# EAGLE board Amplificador_Push_Pull_AB (EAGLE 7.6.0)
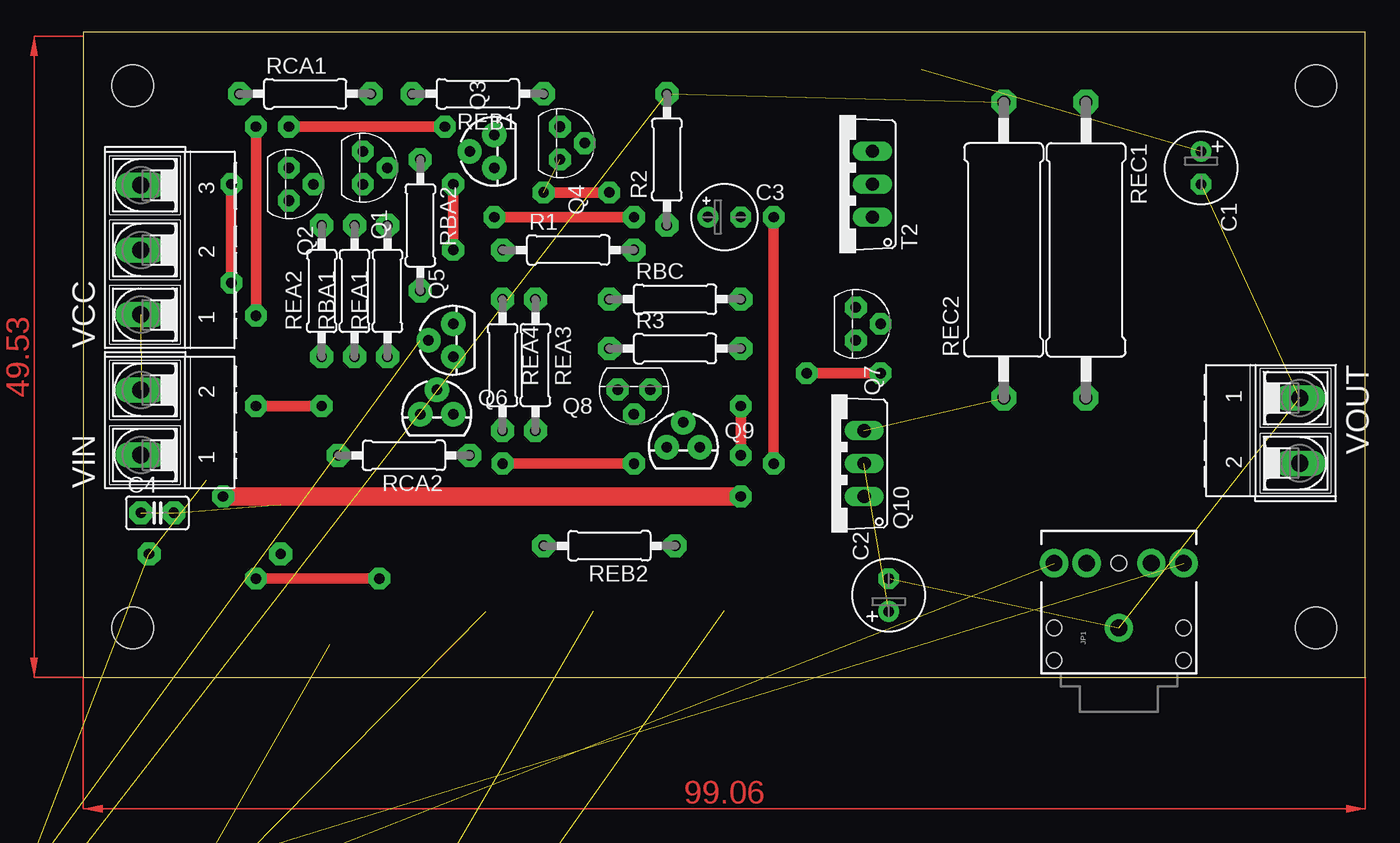
[diagram p0: board, top side]
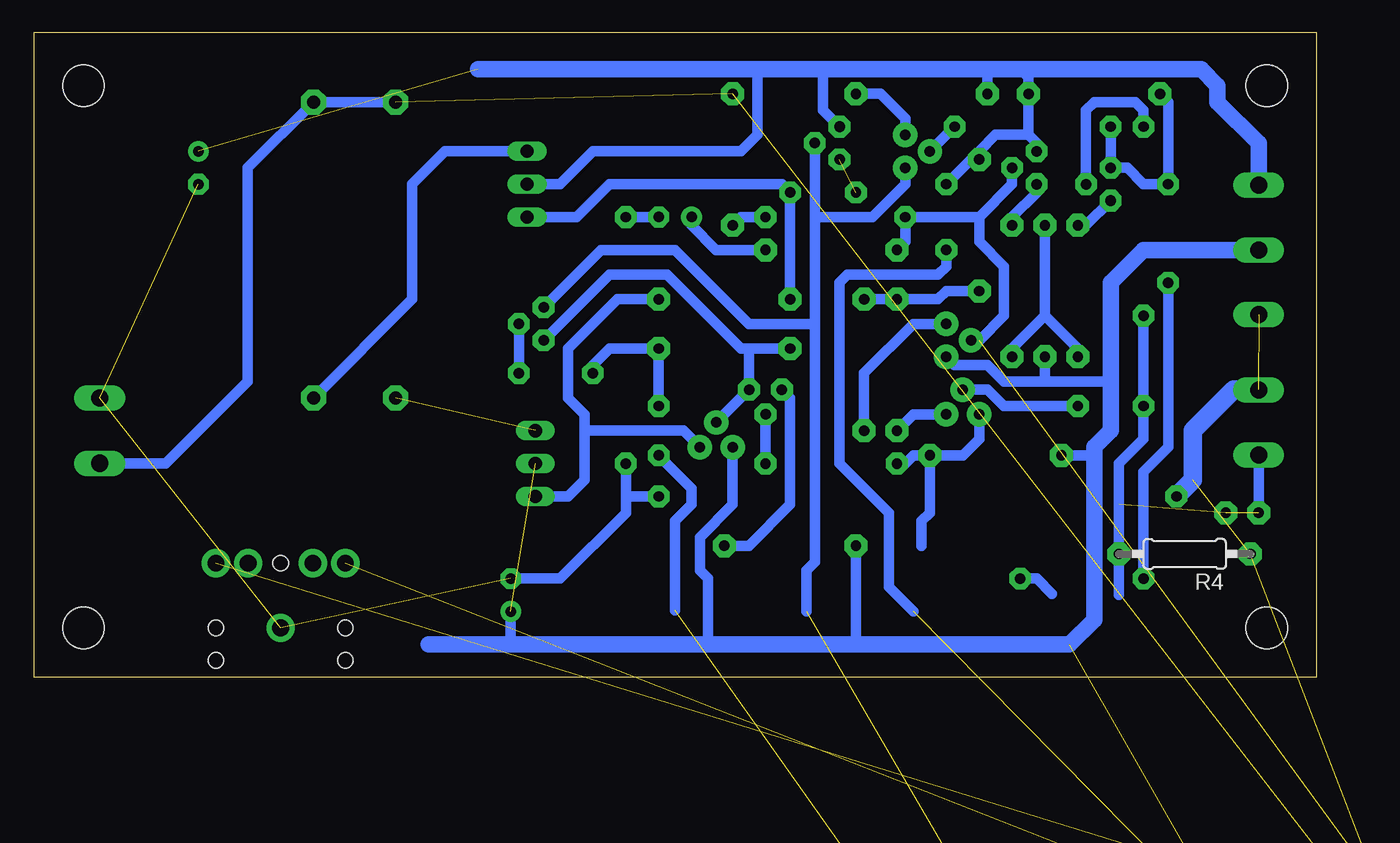
[diagram p1: board, bottom side, seen from below]

Size 99.04 x 49.84 mm. Coordinates in mm from the lower left corner, seen from the top.
Outline: 0,0 99.04,0 99.04,49.84 0,49.84 0,0
Copper layers (1*16): Top 0.035mm / dielectric 1.5mm / Bottom 0.035mm
Design rules "default": minimum track width 10mil, minimum drill 24mil, track to track 8mil, track to pad 8mil, pad to pad 8mil, via to via 8mil, smd to smd 8mil, copper to edge 40mil, drill to drill 8mil, minimum pad ring 10mil, minimum via ring 8mil, stop-mask expansion 4mil, vias tented up to drill 0mil, thermal gap 10mil
Holes 3.2 mm at 3.81,3.81 3.81,45.72 95.25,45.72 95.25,3.81

## Footprints (pad centres in the part's own frame; a part is rotated, then mirrored left to right if it is on the bottom)
E2,5-6 = drill 0.813 pad 1.6: + -1.27,0 | drill 0.813 pad 1.6 octagon: - 1.27,0
E2,5-5 = drill 0.813 pad 1.6: + -1.27,0 | drill 0.813 pad 1.6 octagon: - 1.27,0
C025-025X050 = drill 0.8 pad 1.778 octagon: 1 -1.27,0; 2 1.27,0
DIL08 = drill 0.813 pad 1.27: 1 -3.81,-3.81; 2 -1.27,-3.81; 3 1.27,-3.81; 4 3.81,-3.81; 5 3.81,3.81; 6 1.27,3.81; 7 -1.27,3.81; 8 -3.81,3.81
AUDIO-JACK = drill 1.3 pad 2.184: RING 5,5; RSH 5,2.5; SLEEVE 0,0; TIP 5,-5; TSH 5,-2.5 | hole 1.2: 0,5; -2.5,5; -2.5,-5; 0,-5; 5,0
TO92 = drill 0.813 pad 1.676 octagon: 1 1.27,0; 2 0,1.905; 3 -1.27,0
TO-92 = drill 0.813 pad 1.88: 1 -1.27,0; 2 0,1.905; 3 1.27,0
TO220AV = drill 1.016 long: B -2.54,-2.54; C 0,-2.54; E 2.54,-2.54
9.7ELECTRET = drill 0.8 pad 1.778 long: + 1.3,-0.032; - -1.3,-0.032
0207/10 = drill 0.8 pad 1.778 octagon: 1 -5.08,0; 2 5.08,0
S64W = drill 0.813 long: A 2.54,1.27; E -2.54,1.27; S 0,1.27
0617/22 = drill 1 pad 1.93 octagon: 1 -11.43,0; 2 11.43,0
TO220AV' = drill 1.016 long: 1 -2.54,-2.54; 2 0,-2.54; 3 2.54,-2.54
AK500/3-H = drill 1.321 long: 1 -5.004,0; 2 0,0; 3 5.004,0
AK500/2-H = drill 1.321 long: 1 -2.515,0; 2 2.515,0

## Placement (x,y rotation side)
C1  100uF  [E2,5-6]  86.36,39.37 270 top
C2  100uF  [E2,5-6]  62.23,6.35 90 top
C3  10uF  [E2,5-5]  49.53,35.56 0 top
C4  220nF  [C025-025X050]  5.71,12.7 0 top
C5  10pF  [C025-025X050]  -3.81,-16.51 0 top  (outside the outline)
IC1  LM741P  [DIL08]  -15.24,-46.99 0 top  (outside the outline)
JP1  [AUDIO-JACK]  80.01,3.81 90 top
Q1  BC547  [TO92]  21.59,39.37 270 top
Q2  BC547  [TO92]  15.88,38.1 270 top
Q3  [TO-92]  31.75,40.64 90 top
Q4  BC547  [TO92]  36.83,41.27 270 top
Q5  [TO-92]  28.57,26.04 90 top
Q6  [TO-92]  27.3,20.32 0 top
Q7  BC547  [TO92]  59.69,27.3 270 top
Q8  BC547  [TO92]  42.55,22.23 180 top
Q9  [TO-92]  46.35,17.78 0 top
Q10  TIP42C  [TO220AV]  57.78,16.51 90 top
Q11  [9.7ELECTRET]  -24.13,-69.85 0 top  (outside the outline)
R1  2k2  [0207/10]  37.47,33.02 0 top
R2  47k  [0207/10]  45.09,40.01 90 top
R3  [0207/10]  45.72,25.4 0 top
R4  47k  [0207/10]  10.16,9.53 180 bottom
R6  [S64W]  3.81,-57.15 0 top  (outside the outline)
RBA1  8k2  [0207/10]  20.95,29.84 90 top
RBA2  8k2  [0207/10]  26.04,34.92 270 top
RBC  3k6  [0207/10]  45.72,29.21 0 top
RCA1  2k4  [0207/10]  17.14,45.09 0 top
RCA2  2k4  [0207/10]  24.77,17.14 180 top
REA1  82  [0207/10]  23.5,29.84 90 top
REA2  82  [0207/10]  18.41,29.84 90 top
REA3  82  [0207/10]  34.92,24.13 270 top
REA4  82  [0207/10]  32.38,24.13 270 top
REB1  1k8  [0207/10]  30.48,45.09 180 top
REB2  1k8  [0207/10]  40.64,10.16 180 top
REB5  10k  [0207/10]  -16.51,-40.64 0 top  (outside the outline)
REC1  0.22  [0617/22]  77.47,33.02 270 top
REC2  0.22  [0617/22]  71.12,33.02 90 top
RLEFT  10k  [0207/10]  -16.51,-24.13 0 top  (outside the outline)
RRIGHT  10k  [0207/10]  -16.51,-29.21 0 top  (outside the outline)
T2  2SC1307  [TO220AV']  58.42,38.1 90 top
VCC  [AK500/3-H]  4.45,33.02 90 top
VIN  [AK500/2-H]  4.45,19.68 90 top
VOUT  [AK500/2-H]  93.98,19.05 270 top

## Library data of the parts
C1-C5 R1-R4 RBA1 RBA2 RBC RCA1 RCA2 REA1-REA4 REB1 REB2 REB5 REC1 REC2 RLEFT RRIGHT = rcl
IC1 = linear
JP1 = SparkFun-Connectors
Q1 Q2 Q4 Q7 Q8 = transistor
Q3 Q5 Q6 Q9 = SparkFun-DiscreteSemi
Q10 = transistor-power
Q11 = adafruit
R6 = pot
T2 = transistor-neu-to92
VCC VIN VOUT = con-ptr500; OC_FARNELL: unknown; OC_NEWARK: unknown

## Nets
+18V: C1.+ IC1.7 Q1.3 Q4.3 RBA2.1 RCA1.2 REB1.2 T2.2 VCC.3
-18V: C2.+ IC1.4 Q5.1 Q9.1 Q10.C RBA1.1 RCA2.2 REB2.2 VCC.2
FB: C5.1 Q1.2 Q5.2 R1.1 R2.1
GND: C1.- C2.- C3.- JP1.SLEEVE Q11.- R4.1 VCC.1 VIN.2 VOUT.1
N$1: Q1.1 REA1.2
N$2: RBA1.2 REA1.1 REA2.1
N$3: RBA2.2 REA3.1 REA4.1
N$4: Q2.1 REA2.2
N$5: Q2.3 Q3.2 RCA1.1
N$6: Q6.3 REA4.2
N$7: Q5.3 REA3.2
N$8: Q6.1 Q8.2 RCA2.1
N$9: Q11.+ REB5.2
N$10: Q3.3 REB1.1
N$11: Q3.1 Q4.2 Q7.3 R6.E R6.S
N$12: JP1.RING RRIGHT.1
N$13: Q4.1 RBC.1 T2.1
N$14: JP1.TIP RLEFT.1
N$15: Q7.1 Q8.3 Q9.2 R3.1
N$16: Q8.1 REB2.1
N$17: Q9.3 Q10.B RBC.2
N$18: RLEFT.2
N$19: REC1.2 T2.3
N$20: RRIGHT.2
N$21: Q10.E REC2.1
N$23: C3.+ R1.2
N$24: REB5.1
P1: Q7.2 R3.2 R6.A
VIN: C4.1 C4.2 Q2.2 Q6.2 R4.2 VIN.1
VOUT: C5.2 R2.2 REC1.1 REC2.2 VOUT.2

## Tracks (layer width: path | path; a pad name or v marks a point on that pad's centre or on a via)
+18V  (via drill 0.8 pad 1.68)  (2 unrouted)
  Top 0.813: v28.57,33.02 v28.57,38.1
  Bottom 0.813: 22.23,41.91 RCA1.2 22.23,46.35 22.86,46.99 | 22.23,41.91 24.77,41.91 26.04,40.64 RBA2.1 26.67,40.01 v28.57,38.1 | 31.11,5.08 33.02,6.99 33.02,12.7 36.83,16.51 36.83,30.48 36.2,31.11 29.21,31.11 28.57,31.75 v28.57,33.02 | T2.2 58.42,38.1 55.88,40.64 44.45,40.64 43.18,41.91 43.18,46.99 | REB1.2 25.4,46.99 | Q4.3 38.1,43.81 38.1,46.99 | 22.23,41.91 21.59,41.27 Q1.3
  Bottom 1.27: 64.77,46.99 43.18,46.99 38.1,46.99 25.4,46.99 22.86,46.99 8.89,46.99 7.62,45.72 7.62,44.45 4.45,41.27 VCC.3
-18V  (2 unrouted)
  Bottom 0.813: 17.23,10.08 17.14,10.16 | 46.99,2.54 46.99,7.62 47.62,8.26 47.62,10.79 45.09,13.34 Q9.1 | 20.95,22.86 15.88,22.86 | RBA1.1 20.95,22.86 | Q5.1 27.94,24.13 25.4,24.13 24.13,22.86 20.95,22.86 | RCA2.2 17.14,17.14 | REB2.2 35.56,2.54 | C2.+ 62.23,2.54
  Bottom 1.27: 68.58,2.54 62.23,2.54 46.99,2.54 35.56,2.54 19.05,2.54 17.14,4.45 17.14,10.16 17.14,17.14 17.14,17.78 15.88,19.05 15.88,22.86 15.88,30.48 13.34,33.02 VCC.2
FB  (via drill 0.8 pad 1.68)  (1 unrouted)
  Top 0.813: v42.55,35.56 v31.75,35.56
  Bottom 0.813: 26.04,35.56 v31.75,35.56 31.75,33.66 R1.1 | 26.04,35.56 23.5,38.1 Q1.2 | 26.04,35.56 26.04,33.66 24.13,31.75 24.13,27.94 26.04,26.04 Q5.2 | v42.55,35.56 44.45,35.56 R2.1
GND  (via drill 0.8 pad 1.68)  (6 unrouted)
  Top 0.813: v53.34,16.51 v53.34,35.56
  Top 1.422: v10.79,13.97 v50.8,13.97
  Bottom 0.813: v53.34,35.56 C3.- | C2.- 58.42,7.62 53.34,12.7 53.34,13.97 | 53.34,13.97 v53.34,16.51 | v50.8,13.97 53.34,13.97
  Bottom 1.422: VIN.2 4.47,22.23 6.35,22.23 9.53,19.05 9.53,15.24 v10.79,13.97
N$1
  Bottom 0.813: REA1.2 23.5,35.56 21.59,37.47 Q1.1
N$2
  Bottom 0.813: REA2.1 18.41,25.4 20.95,27.94 | REA1.1 23.5,25.4 20.95,27.94 | 20.95,27.94 RBA1.2
N$3
  Bottom 0.813: REA3.1 REA4.1 29.21,29.21 28.57,29.84 RBA2.2
N$4
  Bottom 0.813: REA2.2 17.78,34.92 Q2.1
N$5  (via drill 0.8 pad 1.68)
  Top 0.813: v15.88,42.55 v27.94,42.55 | v11.43,38.1 v11.43,30.48 | v13.34,7.62 v22.86,7.62
  Bottom 0.813: v11.43,30.48 11.43,17.78 13.34,15.88 v13.34,7.62 | 20.4,6.43 21.59,7.62 v22.86,7.62 | RCA1.1 11.43,44.45 v11.43,38.1 13.34,38.1 14.61,39.37 Q2.3 v15.88,42.55 | v27.94,42.55 Q3.2
N$6
  Bottom 0.813: Q6.3 31.11,20.32 REA4.2
N$7
  Bottom 0.813: REA3.2 34.92,23.5 31.11,27.3 Q5.3
N$8  (via drill 0.8 pad 1.68)
  Top 0.813: v32.38,16.51 v42.55,16.51
  Bottom 0.813: Q6.1 26.04,18.41 27.3,17.14 RCA2.1 | 30.48,10.16 30.48,12.06 29.84,12.7 RCA2.1 | RCA2.1 31.11,17.14 31.75,16.51 v32.38,16.51 | v42.55,16.51 Q8.2
N$9  (1 unrouted)
N$10
  Bottom 0.813: REB1.1 33.66,45.09 31.75,43.18 Q3.3
N$11  (2 unrouted)
  Bottom 0.813: 39.37,5.08 39.37,8.26 38.73,8.89 38.73,27.3 | 38.73,27.3 43.81,27.3 49.53,33.02 55.24,33.02 Q7.3 | Q3.1 31.75,38.1 34.29,35.56 38.73,35.56 | 38.73,27.3 38.73,35.56 | 38.73,35.56 Q4.2
N$12  (1 unrouted)
N$13  (via drill 0.8 pad 1.68)  (1 unrouted)
  Top 0.813: v35.56,37.47 v40.64,37.47
  Bottom 0.813: T2.1 57.15,35.56 54.61,38.1 41.27,38.1 v40.64,37.47 RBC.1
N$14  (1 unrouted)
N$15
  Bottom 0.813: Q7.1 54.61,31.11 50.16,31.11 44.45,25.4 43.81,25.4 | 43.81,25.4 R3.1 | 43.81,25.4 Q8.3 Q9.2
N$16
  Bottom 0.813: REB2.1 43.81,10.16 40.64,13.34 40.64,21.59 Q8.1
N$17
  Bottom 0.813: 56.52,19.05 56.52,15.24 57.78,13.97 Q10.B | 56.52,19.05 48.9,19.05 Q9.3 | 56.52,19.05 56.52,20.32 57.78,21.59 57.78,25.4 53.98,29.21 RBC.2
N$19
  Bottom 0.813: REC1.2 69.85,29.21 69.85,38.1 67.31,40.64 T2.3
N$21  (1 unrouted)
N$23
  Bottom 0.813: C3.+ 48.26,34.92 46.35,33.02 R1.2
P1  (via drill 0.8 pad 1.68)  (1 unrouted)
  Top 0.813: v50.8,17.14 v50.8,20.95 | v55.88,23.5 v61.59,23.5
  Bottom 0.813: v61.59,23.5 Q7.2 | v50.8,20.95 R3.2 54.61,25.4 55.88,24.13 v55.88,23.5 | 49.53,5.16 49.53,12.06 48.26,13.34 48.26,14.61 v50.8,17.14
VIN  (via drill 0.8 pad 1.68)  (2 unrouted)
  Top 0.813: v18.41,20.95 v13.34,20.95 | v13.34,42.55 v13.34,27.94
  Bottom 0.813: v13.34,27.94 v13.34,20.95 13.34,18.41 15.24,16.51 15.24,13.34 R4.2 15.24,6.35 | C4.1 VIN.1 | v13.34,42.55 13.34,43.81 13.97,44.45 17.14,44.45 17.78,43.81 Q2.2 | v18.41,20.95 24.13,20.95 25.4,22.23 Q6.2
VOUT  (2 unrouted)
  Bottom 0.813: REC2.2 REC1.1 82.55,39.37 82.55,22.86 88.88,16.54 VOUT.2
(copper drawn outside any net)
  shapes: Top area x2